# Altium PCB PCB1.PcbDoc
Units mil, origin at the board's own origin, x right, y up, seen from the top; angles counter-clockwise.
Board outline 2353 x 1336 mil, 2 copper layers (Top Layer, Bottom Layer), stack 60.4 mil thick; 21 components, 12 nets, 70 pads, 21 vias.
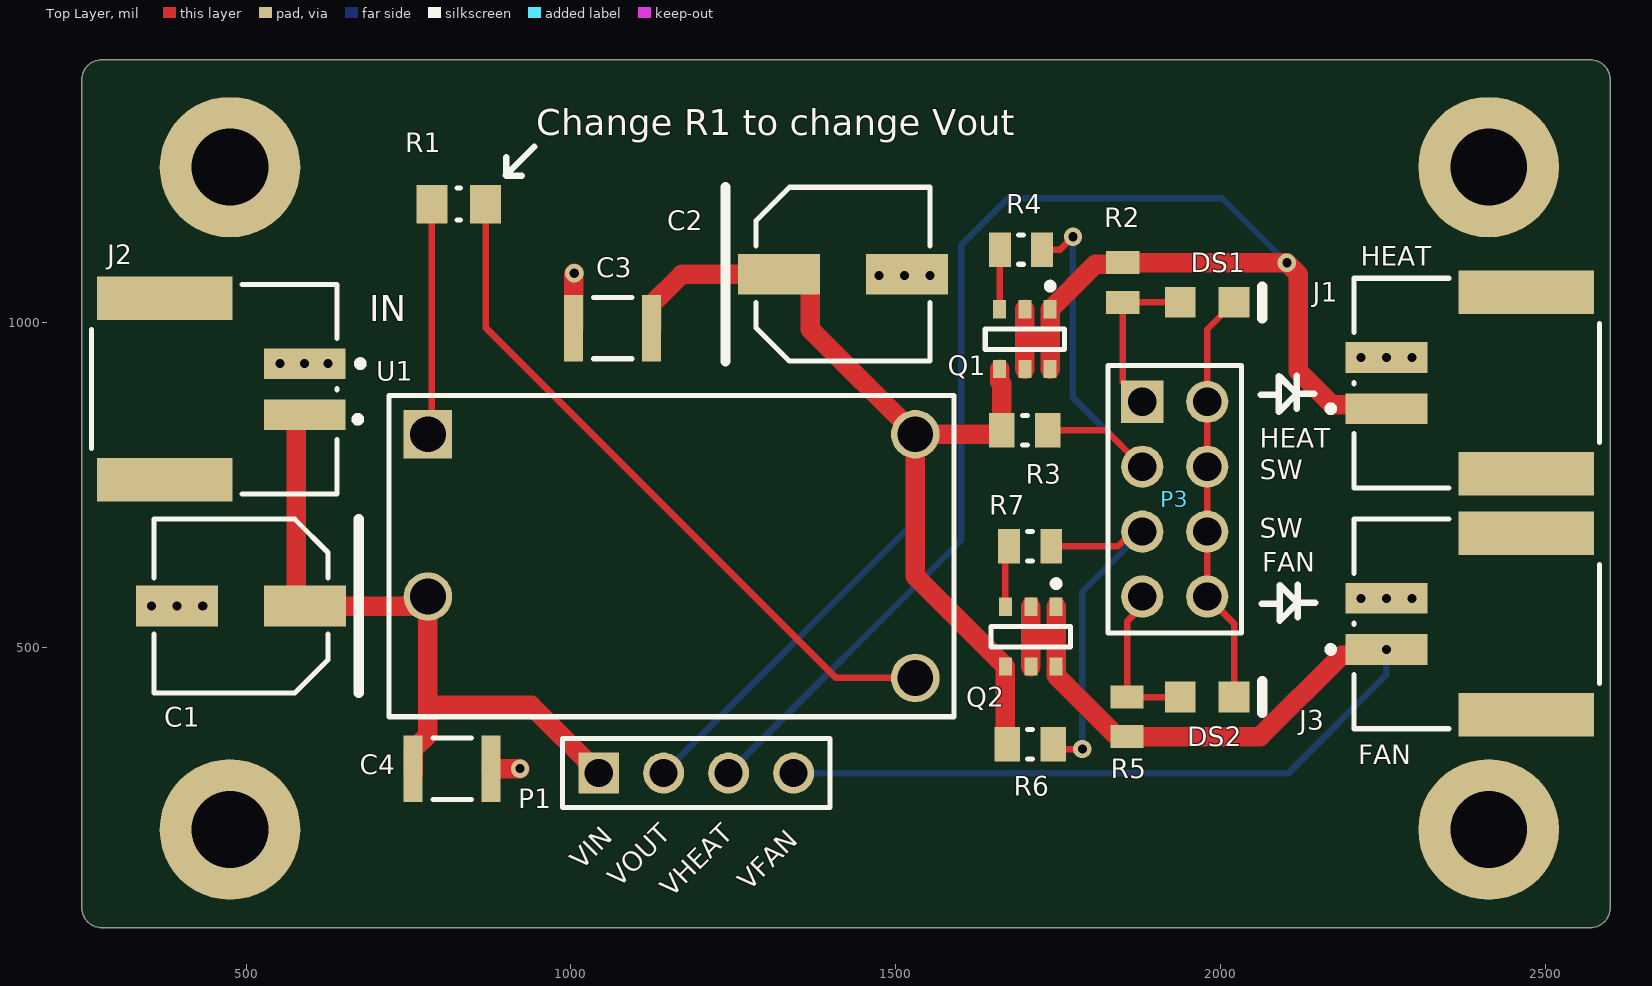
[diagram p0: Top Layer view]
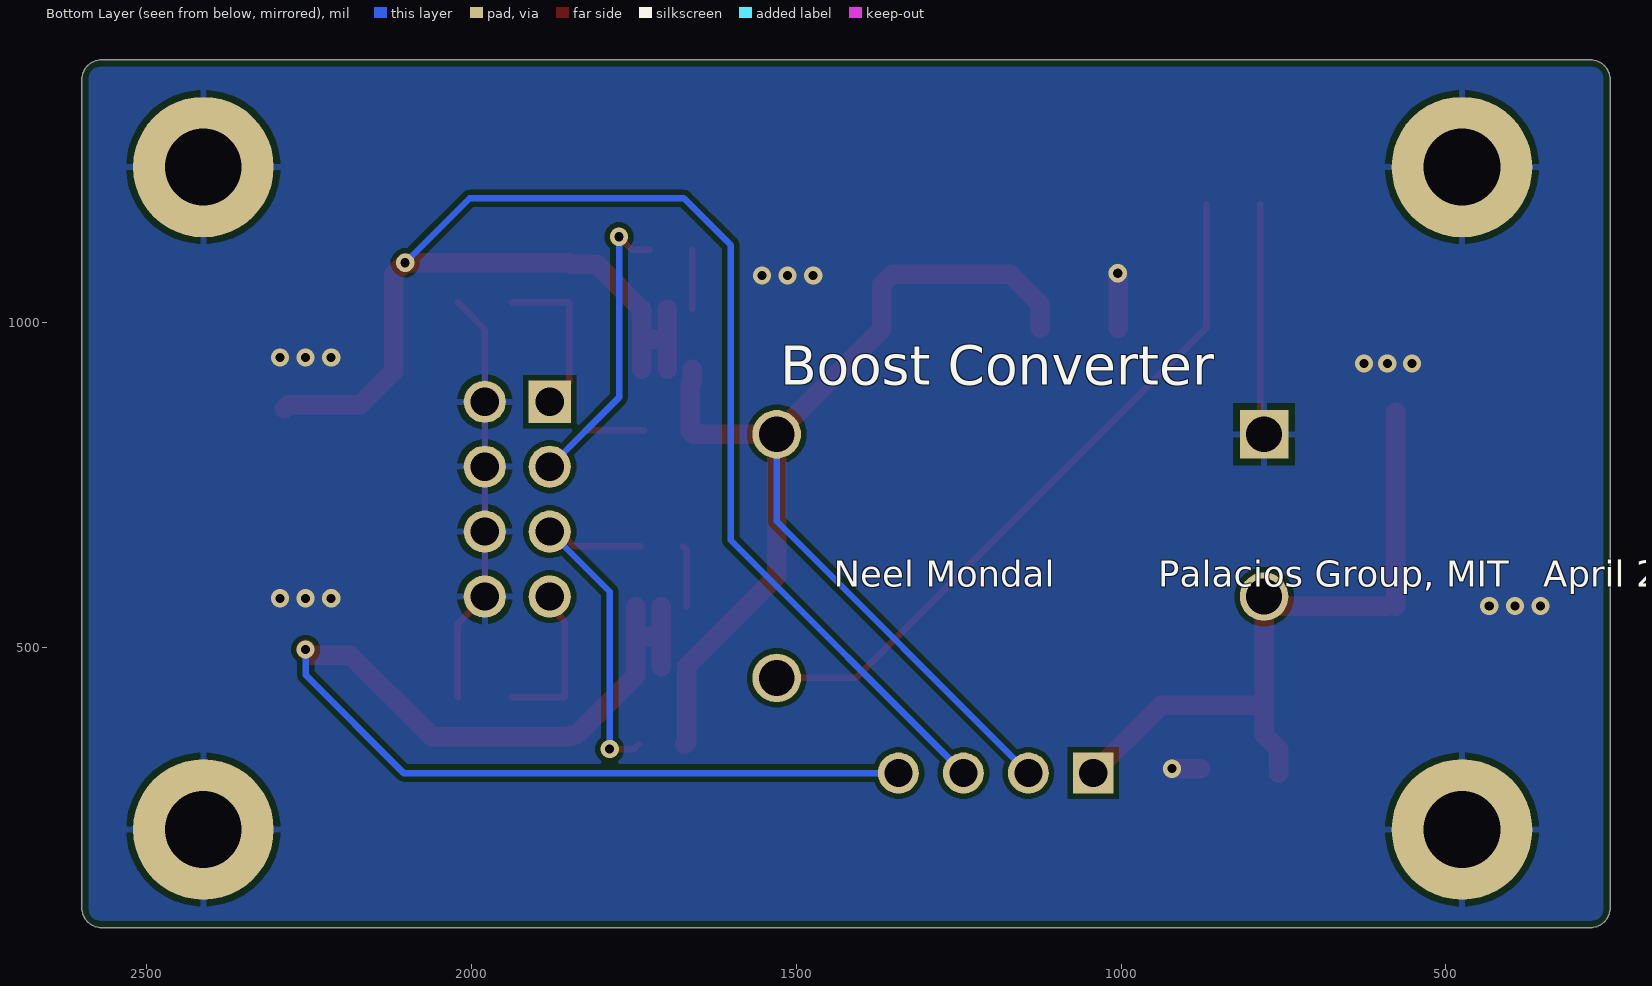
[diagram p1: Bottom Layer view, seen from below]
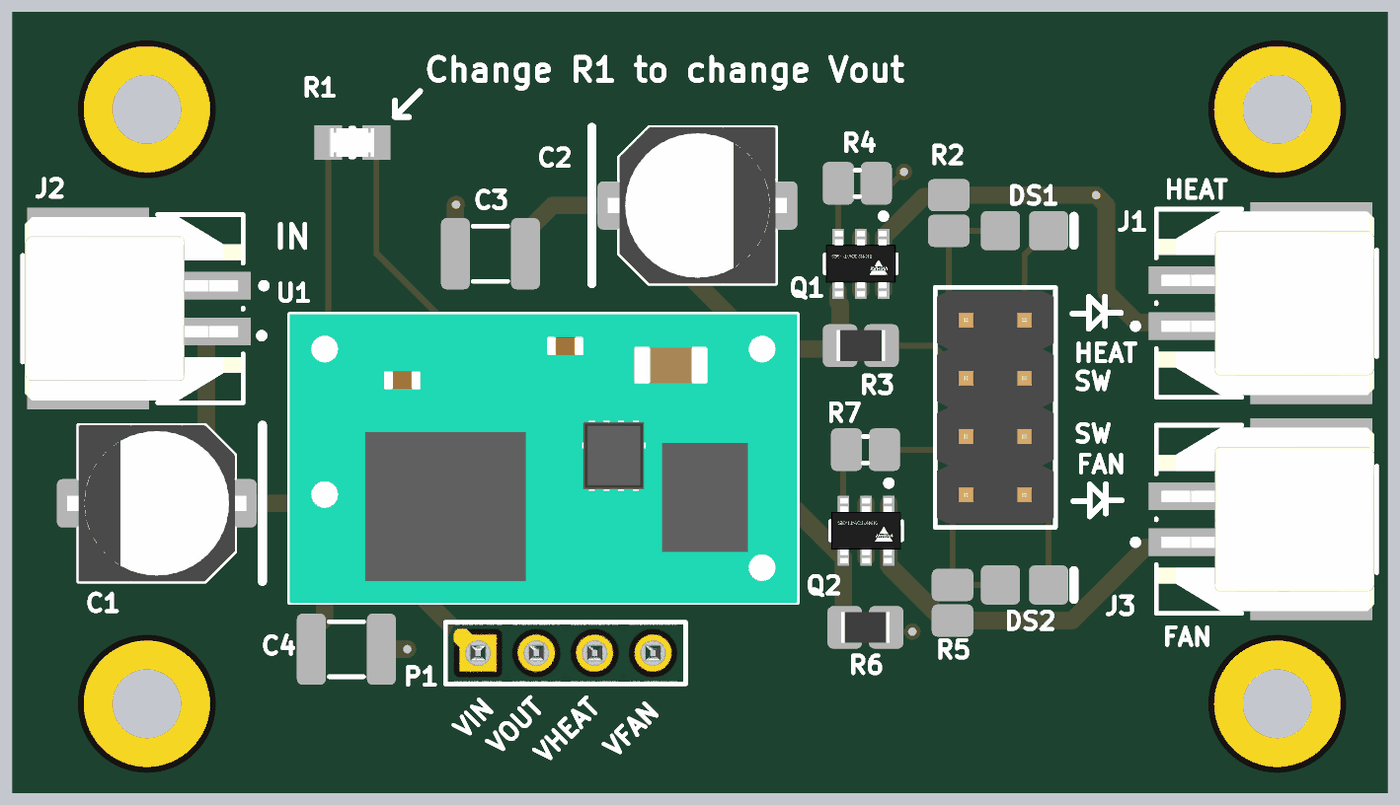
[diagram p2: 3D render of the assembled board from above, using the file's embedded part models]

## Layer stack, top to bottom
Top Solder: solder mask 0.5, Solder Resist, Dk 3.3
Top Layer: signal copper 0.7
Dielectric1: core 59, FR-4, Dk 4.3
Bottom Layer: signal copper 0.7
Bottom Solder: solder mask 0.5, Solder Resist, Dk 3.3

## Board outline
247,99 247,1375 cw(c277,1375) 277,1405 2570,1405 cw(c2570,1375) 2600,1375 2600,99 cw(c2570,99) 2570,69 277,69 cw(c277,99)

## Design rules (kind name [scope] priority, off if disabled: settings)
BoardOutlineClearance [All] p1: gap=10 ignorepadtopadclearanceinfootprint=FALSE
Clearance [All] p1: gap=8 ignorepadtopadclearanceinfootprint=FALSE except(12: Arc-Via Track-Via)
DiffPairsRouting [All] p1: maxlimit=10 minlimit=10 mostfreqgap=10 toplayer_minwidth=10 toplayer_maxwidth=10 toplayer_prefwidth=10 bottomlayer_minwidth=10 bottomlayer_maxwidth=10 bottomlayer_prefwidth=10 maxuncoupledlength=500
HoleSize [All] p1: absolutevalues=TRUE maxlimit=300 minlimit=12 maxpercent=80.000 minpercent=20.000
MinimumAnnularRing [All] p1: minimumring=7
MinimumSolderMaskSliver [All] p1: minsoldermaskwidth=5
PasteMaskExpansion [All] p1: expansion=10
PlaneClearance [All] p1: clearance=15
PlaneConnect [All] p1: pad.planeconnectstyle=Relief pad.reliefexpansion=20 pad.reliefentries=4 pad.reliefconductorwidth=10 pad.reliefairgap=10 via.planeconnectstyle=Direct via.reliefexpansion=20 via.reliefentries=4 via.reliefconductorwidth=10 via.reliefairgap=10
PolygonConnect [All] p1: thpad.connectstyle=Relief thpad.reliefconductorwidth=10 thpad.reliefentries=4 thpad.polygonreliefangle="90 Angle" thpad.airgapwidth=10 smdpad.connectstyle=Relief smdpad.reliefconductorwidth=10 smdpad.reliefentries=4 smdpad.polygonreliefangle="90 Angle" smdpad.airgapwidth=10 via.connectstyle=Direct via.reliefconductorwidth=10 via.reliefentries=4 via.polygonreliefangle="90 Angle" via.airgapwidth=10
RoutingVias [All] p1: holewidth=14 width=28 viastyle="Through Hole" minholewidth=14 minwidth=28 maxholewidth=14 maxwidth=28
SMDNeckDown [All] p1: percent=150.000
SilkToSolderMaskClearance SilkscreenOverComponentPads [IsPad] p1: minsilkscreentomaskgap=4 clearancetoexposedcopper=TRUE
SolderMaskExpansion [All] p1: expansion=10 istentingtop=FALSE
Width [All] p1: maxlimit=30 minlimit=10 preferedwidth=10
23 further rules are at their usual default settings.

## Components (designator, comment, footprint, x,y, rotation, side; value= is the part's Value field where it differs from the comment)
C1 "100uF" PNSC-FK-V-D8_V 492,564 r180 top
C2 "100uF" PNSC-FK-V-D8_V 1419,1075 r0 top
C3 "22uF" MURA-1210_H_2.7_L 1064,992.17 r0 top
C4 "22uF" MURA-1210_H_2.7_L 817.04,313.71 r0 top
DS1 "HSMD-C170" AVAG-HSMX-C170_V 1979.7,1031.69 r0 top
DS2 "HSMD-C170" AVAG-HSMX-C170_V 1979.7,423.94 r0 top
J1 "502352-0200" FP-502352-0200-MFG 2394.5,907.34 r90 top locked
J2 "502352-0200" FP-502352-0200-MFG 451,898 r270 top locked
J3 "502352-0200" FP-502352-0200-MFG 2394.5,536.62 r90 top locked
P1 "61300411121" 61300411121 1192.74,307 r0 top
P3 "61300821121" 61300821121 1929.7,728.63 r270 top
Q1 "SI3493DDV-T1-GE3" FP-C-06593-MFG 1698.93,974.99 r270 top
Q2 "SI3493DDV-T1-GE3" FP-C-06593-MFG 1708.05,516.93 r270 top
R1 "12k" FP-CRCW0805-e3-IPC_A 827.2,1183 r0 top
R2 "1k" RESC2013X55X40LL15T20 1849.78,1062.2 r90 top
R3 "10k" RESC2013X60X35NL10T20 1698.93,834.61 r0 top
R4 "100" RESC2013X50X30LL20T20 1692.98,1112.99 r180 top
R5 "1k" RESC2013X55X40LL15T20 1856.23,393.43 r270 top
R6 "10k" RESC2013X60X35NL10T20 1706.98,351.11 r0 top
R7 "100" RESC2013X50X30LL20T20 1706.98,655.99 r180 top
U1 "PTN04050CAD" EUU0004A 1155,641 r0 top

## Footprints (in the part's own frame and the unit in brackets; to place one, negate y for a bottom-side part, rotate by r counter-clockwise, add the part's x,y. Pads: shape width x height; smd on the part's side, far side on the other; paste and mask are expansions set on the pad)
61300411121 [mm] "Pin Header, pitch 2.54 mm, THT, Vertical, single row, 4p"
  rect 1.6x1.6 hole 1.1: 1(-3.81,0)
  round 1.6 hole 1.1: 2(-1.27,0) 3(1.27,0) 4(3.81,0)
  silkscreen extent -5.23,-1.35 5.23,1.35, body extent -5.08,-1.27 5.08,1.27, height 8.57
61300821121 [mm] "Pin Header, pitch 2.54 mm, THT, Vertical, dual row, 8p"
  rect 1.65x1.65 hole 1.1: 1(-3.81,-1.27)
  round 1.65 hole 1.1: 2(-3.81,1.27) 3(-1.27,-1.27) 4(-1.27,1.27) 5(1.27,-1.27) 6(1.27,1.27) 7(3.81,-1.27) 8(3.81,1.27)
  silkscreen extent -5.23,-2.62 5.23,2.62, body extent -5.08,-2.54 5.08,2.54, height 8.59
AVAG-HSMX-C170_V [mm] "SMD, 2-Leads, Body 2x1.25mm, Height 0.8mm"
  rect 1.2x1.2 smd: 1(-1.05,0) 2(1.05,0)
  silkscreen extent 2.15,-0.63 2.15,0.63, body extent -1,-0.63 1,0.63, height 0.8
EUU0004A [mm] "Module, 4-Leads, Body 22.1x12.57mm"
  rect 1.9x1.9 hole 1.4: 1(-9.53,4.765)
  round 1.9 hole 1.4: 2(-9.53,-1.585) 3(9.53,-4.765) 4(9.53,4.765)
  silkscreen extent -12.4,-6.28 11.05,6.28, body extent -11.05,-6.28 11.04,6.29, height 7.8
FP-502352-0200-MFG [mm]
  rect 1.2x3.2 smd paste+0 mask+0: 1(-1,3.53) 2(1,3.53)
  rect 1.7x5.3 smd paste+0 mask+0: 3(-3.55,-1.95) 4(3.55,-1.95)
  silkscreen extent -4.1,-4.8 4.1,5.83, body extent -4.5,-4.9 4.5,5.23, height 0.25
FP-C-06593-MFG [mil]
  rect 28x20 smd paste+0 mask+0: 1(-46,39) 2(-46,0) 3(-46,-39) 4(46,-39) 5(46,0) 6(46,39)
  silkscreen extent -87,-61 16,61, body extent -64,-65 64,65, height 10
FP-CRCW0805-e3-IPC_A [mil]
  rect 47.5x59.38 smd paste+0 mask+0: 1(-41.37,0) 2(41.37,0)
  silkscreen extent -3,-25 3,25, body extent -85,-49 85,49, height 10
MURA-1210_H_2.7_L [mm] "Chip Capacitor, 2-Leads, Body 3.5x2.7mm, IPC High Density"
  rect 0.75x2.6 smd: 1(-1.525,0) 2(1.525,0)
  silkscreen extent -0.75,-1.2 0.75,1.2, body extent -1.75,-1.35 1.75,1.35, height 2.7
PNSC-FK-V-D8_V [mm] "CAPAE, 2-Leads, Body 6.80x6.80mm"
  rect 3.2x1.6 smd: 1(-2.5,0) 2(2.5,0)
  silkscreen extent -4.6,-3.4 3.4,3.4, body extent -3.9,-3.4 3.9,3.4, height 8
RESC2013X50X30LL20T20 [mm] "Chip Resistor, 2-Leads, Body 2.00x1.25mm, IPC High Density"
  rect 0.85x1.35 smd: 1(-0.825,0) 2(0.825,0)
  silkscreen extent -0.1,-0.58 0.1,0.58, body extent -1.1,-0.73 1.1,0.73, height 0.5
RESC2013X55X40LL15T20 [mm] "Chip Resistor, 2-Leads, Body 2.00x1.25mm, IPC High Density"
  rect 0.9x1.3 smd: 1(-0.775,0) 2(0.775,0)
  body extent -1.07,-0.7 1.07,0.7, height 0.55
RESC2013X60X35NL10T20 [mm] "Chip Resistor, 2-Leads, Body 2.1x1.35mm, IPC Medium Density"
  rect 1x1.35 smd: 1(-0.9,0) 2(0.9,0)
  silkscreen extent -0.1,-0.58 0.1,0.58, body extent -1.05,-0.68 1.05,0.67, height 0.6

## Part data
C1 C2: library part CMP-2000-06206-1, "Aluminum Electrolytic Capacitor, 100 uF, +/- 20%, 25 V, 2-Pin SMD (Size Code D8), -55 to 105 degC, RoHS, Tape and Reel", Capacitance=100µF, Case Size/Dimension=Ø6.3x7.7mm, Lifetime@Temperature=2000Hrs@105°C, Manufacturer=Panasonic, Operating Temp Range=-55to+105°C, Operating Temp-Max=105°C, Package Description="2-Pin Electrolytic Aluminum Capacitor, Body 6.6 x 6.6 mm", Package Reference=FK-V-D8, Rated Voltage=25V, Ripple Current=280mA, Datasheet URL=http://industrial.panasonic.com/cdbs/www-data/pdf/RDE0000/ABA0000C1181.pdf, Datasheet Version=03/2016, Impedance=0.34O, Manufacturer URL=http://www.panasonic.com/, Mounting Technology=SurfaceMount, Package URL=http://industrial.panasonic.com/cdbs/www-data/pdf/RDE0000/DME0000COL48.pdf, Series=FK, Type=Can
C3 C4: library part CMP-2000-06361-1, "Chip Monolithic Ceramic Capacitor, 22 uF, +/- 10%, -55 to 85 degC, 2-Pin SMD (1210), RoHS, Tape and Reel", Capacitance=22µF, Manufacturer=Murata, Operating Temperature=-55°C~85°C, Package / Case=1210(3225Metric), Package Description="2-Pin Surface Mount Device, Body 3.2 x 2.5 mm", Package Reference=1210, Ratings=-, Standard Package=1,000, Temperature Coefficient=X5R, Tolerance=±10%, Voltage - Rated=16V, Applications=GeneralPurpose, Catalog Drawings=GRMSeries_1210_2.5, Category=Capacitors, Datasheet URL=https://datasheet.ciiva.com/26915/getdatasheetpartid-88858-26915376.pdf, Datasheet Version=05/2014, Family=CeramicCapacitors, Featured Product=GA3SafetyRecognizedCapsandHi-CapMLCC, Features=-, Height - Seated (Max)=-, Lead Spacing=-, Lead Style=-, Manufacturer URL=http://www.murata.com/, Mounting Technology=SurfaceMount, Mounting Type=SurfaceMount,MLCC, Online Catalog=GRMSeries, Other Names=490-1882-2, Packaging=Tape&Reel(TR), Product Training Modules=High-CapMultilayerCeramicCapacitors, Series=GRM, Size / Dimension="0.126\"Lx0.098\"W(3.20mmx2.50mm)", Thickness (Max)="0.106\"(2.70mm)", Voltage Rating DC=16V
DS1 DS2: library part CMP-2000-06421-1, "LED Uni-Color Orange, 52 mW, 20 mA, -40 to 85 degC, 2-Pin SMD, RoHS, Tape and Reel", Forward Current If=20mA, Forward Voltage=2.2V, LED Colour=Orange, Manufacturer=Avago, Operating Temperature Max=85°C, Operating Temperature Min=-30°C, Operating Temperature Range=-30°Cto+85°C, Opto Case Style=SMD, Package Description="2-Pin Surface Mount Device, Body 2 x 1.25 mm, Height 0.8 mm", Package Reference=HSMX-C170, Power Dissipation Pd=52mW, Storage Temperature Min=-40°C, Bulb Size=1.25mmx1.4mm, Datasheet URL=http://docs.avagotech.com/docs/AV02-0551EN, Datasheet Version=03/2012, Dominant Wavelength=604nm, External Depth=0.8mm, External Length / Height=2mm, External Width=1.25mm, Forward Current If Max=20mA, Forward Voltage VF Max=2.2V, LED Mounting=SMD, LED Type=Standard, Lens Shape=Rectangular, Light Area Height=1.25mm, Luminous Intensity=8mcd, Luminous Intensity Typ=8mcd, Manufacturer URL=http://www.avagotech.com/, Mounting Technology=SurfaceMount, Mounting Type=SMD, MSL=MSL2A-4weeks, No. of Pins=2, Opto Mounting Orientation=Top, Package / Case=SMD, Peak Forward Current=20mA, Peak Wavelength=605nm, PIV Max=5V, Storage Temperature Max=85°C, SVHC=NoSVHC(19-Dec-2012), Viewing Angle=170°, Voltage Vf Typ=2.2V, Wavelength Typ=605nm
J1 J2 J3: library part CMP-04776-000115-1, "CONN HEADER SMD R/A 2POS 2MM", Ambient Temperature Range High=+105°C, Ambient Temperature Range Low=-40°C, Current Rating=3A, Manufacturer=Molex, Temperature="-40°C to +105°C", Voltage Rating=125V, Automotive=No, Category=Conn, ComponentLink2Description=Datasheet, ComponentLink2URL=https://www.molex.com/webdocs/datasheets/pdf/en-us/5023520200_PCB_HEADERS.pdf, Conn Gender=Male, Conn Orientation="Right Angle", Contact Material=Tin,Nickel, Device Class L1=Connectors, Device Class L2="Headers and Wire Housings", Device Class L3=unset, Digikey Description="CONN HEADER SMD R/A 2POS 2MM", Footprint Url=https://www.molex.com/pdm_docs/sd/5023520200_sd.pdf, Height=6.6mm, Lead Free=Yes, Manufacturer Part Number=502352-0200, Mouser Description="DuraClik™ Wire-to-Board Header, Single Row, Right Angle, 2 Circuits, Tin (Sn)", Number of Contacts=2, Number of Rows=1, Octopart=https://octopart.com/502352-0200-molex-9519058, Package=502352-0200, Pitch=2mm, RoHS=TRUE, Temperature Range High=+105°C, Temperature Range Low=-40°C
P1: library part CMP-1502-01064-1, "THT Vertical Pin Header WR-PHD, Pitch 2.54 mm, Single Row, 4 pins", Contact Resistance=20mOhm, Manufacturer="Wurth Elektronik", Operating Temperature=-40to105degC, Rated Current=3A, Withstanding Voltage=500VAC, Working Voltage=250VAC, Datasheet URL=https://katalog.we-online.de/em/datasheet/6130xx11121.pdf, Gender=Male, Manufacturer URL=http://www.we-online.de, Mounting Technology=THT, Orientation=Vertical, Package Reference=61300411121, Packaging=Bag, Part Number=61300411121, Pin Number=4, Pitch=2.54mm, Publisher=WurthElektronik, Row Number=Single
P3: library part CMP-1502-01078-1, "THT Vertical Pin Header WR-PHD, Pitch 2.54 mm, Dual Row, 8 pins", Contact Resistance=20mOhm, Manufacturer="Wurth Elektronik", Operating Temperature=-40to105degC, Rated Current=3A, Withstanding Voltage=500VAC, Working Voltage=250VAC, Datasheet URL=https://katalog.we-online.de/em/datasheet/6130xx21121.pdf, Gender=Male, Manufacturer URL=http://www.we-online.de, Mounting Technology=THT, Orientation=Vertical, Package Reference=61300821121, Packaging=Bag, Part Number=61300821121, Pin Number=8, Pitch=2.54mm, Publisher=WurthElektronik, Row Number=Dual
Q1 Q2: library part CMP-02550-000156-1, "MOSFET P-CHANNEL 20V 8A 6TSOP", Continuous Drain Current=-7.5A, Drain To Source Breakdown Voltage=-20V, Drain To Source Resistance=0.02Ω, Gate To Source Voltage=8V, Input Capacitace At Vds="1825pF @ -10V", Manufacturer=Vishay, Max Forward Diode Voltage=-1.2V, Max Junction Temp=+150°C, Package=C-06593, Power Dissipation=2W, Pulse Drain Current=-32A, Temperature="-55°C to +150°C", Temperature Range Low=-55°C, Typ Forward Diode Voltage=-0.8V, Automotive=No, Category=Trans, ComponentLink2Description=Datasheet, ComponentLink2URL=https://www.vishay.com/docs/74735/si3493ddv.pdf, Depletion Mode=False, Device Class L1="Discrete Semiconductors", Device Class L2=Transistors, Device Class L3=MOSFETs, Digikey Description="MOSFET P-CHANNEL 20V 8A 6TSOP", Drain To Source Voltage=-20V, Footprint Url=https://www.vishay.com/docs/71200/71200.pdf, Gate Charge At Vgs="34.8nC @ -8V", Height=1.1mm, Lead Free=Yes, Manufacturer Part Number=SI3493DDV-T1-GE3, Number of Channels=1, Number Of P Channels=1, Octopart=https://octopart.com/si3493ddv-t1-ge3-vishay-81014282, Reverse Recovery Charge=34.8nC, Reverse Recovery Time=21ns, RoHS=TRUE, Rthja Max=62.5°C/W, Standoff Height=0.01mm, Temperature Range High=+150°C, Threshold Vgs Max=-1V, Threshold Vgs Min=-0.4V, Transconductance=30S, Turn Off Delay Time=95ns, Turn On Delay Time=25ns
R1: library part CMP-2001-04934-2, "RES Thick Film, 12kΩ, 1%, 0.125W, 100ppm/°C, 0805", Case Code (Imperial)=0805, Case Code (Metric)=2012, Max Operating Temperature=155°C, Max Power Dissipation=125mW, Min Operating Temperature=-55°C, Package Quantity=10, Resistance=12kR, Temperature Coefficient=100ppm/°C, Tolerance=1%, Voltage Rating=150V, Case/Package=0805, Composition="Thick Film", Contact Plating=Tin, Depth=1.25mm, Features="Automotive AEC-Q200", Height=0.45mm, Lead Free="Lead Free", Length=2mm, Military Standard=Not, Mount="Surface Mount", Number of Terminations=2, Packaging="Tape and Reel", Power Rating=125mW, Radiation Hardening=No, Termination=SMD/SMT, Voltage Rating (DC)=150V, Weight=0.000194oz, Width=0.049inch
R2 R5: library part CMP-2001-04738-1, "TNPW08051K00BEEN", Manufacturer="Vishay Dale", Part Number=TNPW08051K00BEEN
R3 R6: library part CMP-1659-00013-4, "Chip Resistor, 10 KOhm, +/- 1%, 0.125 W, -55 to 155 degC, 0805 (2012 Metric), RoHS, Tape and Reel", Manufacturer=Yageo, Max Operating Temperature="155 degC", Min Operating Temperature="-55 degC", Package Quantity=5000, Voltage Rating="150 V", ComponentLink1Description="Manufacturer URL", ComponentLink1URL=http://www.yageo.com/, ComponentLink2Description=Datasheet, ComponentLink2URL=http://www.yageo.com/documents/recent/PYu-RC_Group_51_RoHS_L_04.pdf, DatasheetVersion="Rev. 4, 02/2016", Height="0.5 mm", Length="2 mm", Mount="Surface Mount", Mounting Technology="Surface Mount", PackageDescription="2-Pin Surface Mounted Device, Body 2 x 1.25 mm", PackageReference=0805, Packaging="Tape and Reel", Pins=2, REACH SVHC="No SVHC", RoHSCompliant=true
R4 R7: library part CMP-2001-04901-1, Manufacturer="Vishay Dale", Part Number=CRCW0805100RFKEA
U1: library part CMP-0387-00658-2, "12 W, 3.3 / 5 V Input, Wide Adjust Output Boost Converter, -40 to 85 degC, 4-pin Module (EUU4), Pb-Free (RoHS)", Manufacturer="Texas Instruments", ComponentLink1Description="Manufacturer URL", ComponentLink1URL=http://www.ti.com/, ComponentLink2Description=Datasheet, ComponentLink2URL=http://www.ti.com/general/docs/lit/getliterature.tsp?genericPartNumber=PTN04050C&fileType=pdf, ComponentLink3Description="Package Specification", ComponentLink3URL=http://www.ti.com/litv/pdf/mpds218a, ComponentLink4Description="URL Link1", ComponentLink4URL="Samples URL:http://www.ti.com/product/ptn04050c#samples", DatasheetVersion=SLTS251A, Eco-Plan="Pb-Free (RoHS)", Iout(Max)(A)=2.4, Mounting Technology="Through Hole", PackageDescription="4-Pin Plastic Special Shape, Body 12.57 x 22.1 mm", PackageReference=EUU0004A, PackageVersion=4205246-2/C, PartNumber=PTN04050CAD, Regulated Outputs(#)=1, SubFamily="Non-Isolated POL", Vin(Max)(V)=5.5, Vin(Min)(V)=2.95, VO Adjustable=TRUE, Vout(Max)(V)=15, Vout(Min)(V)=5

## Free pads (board coordinates)
  round 216.54 hole 118.11: 5(475,220) 5(475,1240) 5(2413,220) 5(2413,1240)

## Via types
v1: diameter 28, hole 14, Top Layer to Bottom Layer, tented both sides, 21 vias

## Nets (pads, with @x,y where several pads share a name; then routed paths per layer and width w, separated by ;. In a path a pad name is that pad's centre, name@x,y a point inside that pad or via, vN(x,y) a via of type N, cw(c..) or ccw(c..) an arc to the next point about the centre after c; other vN are vias at no path point)
FAN_LED_HI: DS2.1 P3.7 R5.1 | length 246.5
  Top Layer w10: P3.7 1879.7,563.76 1856.23,540.29 R5.1 DS2.1
FAN_SW: P3.5 R6.2 R7.1 | length 570.7
  Top Layer w10: R7.1 1842.19,655.99 1864.83,678.63 P3.5 ; R6.2 1749.72,343.8 v1(1787.37,343.8)
  Bottom Layer w10: v1(1787.37,343.8) 1787.37,586.3 P3.5
GND: C1.2 C2.2 C3.1 C4.2 DS1.2 DS2.2 J1.2 J2.1 J3.2 P3.2 P3.4 P3.6 P3.8 pad.5 R1.1 U1.1 | length 1128.1
  Top Layer w10: U1.1 785.83,834.63 R1.1 ; DS2.2 2021.04,537.29 P3.8 P3.6 P3.4 P3.2 1979.7,990.35 DS1.2
  Top Layer w30: C4.2 v1(921.53,313.71) ; C3.1 1003.96,1075.33 v1(1005.11,1076.48)
  other v1: 354.15,564 393.57,564 433,564 2216.16,575.99 2255.53,575.99 2294.96,575.99 552.05,937.37 589.98,937.37 625.86,937.37 2216.16,946.71 2255.53,946.71 2294.96,946.71 1474,1073 1513.43,1073 1552.86,1073
HEAT_LED_HI: DS1.1 P3.1 R2.1 | length 254
  Top Layer w10: P3.1 1849.78,908.55 R2.1 DS1.1
HEAT_SW: P3.3 R3.2 R4.1 | length 622.5
  Top Layer w10: R4.1 1753.32,1112.99 v1(1773.01,1132.67) ; R3.2 1823.72,834.61 P3.3
  Bottom Layer w10: v1(1773.01,1132.67) 1773.01,885.32 P3.3
NetQ1_3: Q1.3 R4.2 | length 92.2
  Top Layer w10: Q1.3 1659.93,1112.42 R4.2
NetQ2_3: Q2.3 R7.2 | length 95.3
  Top Layer w10: Q2.3 1669.05,650.53 R7.2
NetR1_2: R1.2 U1.3 | length 1075.2
  Top Layer w10: R1.2 868.58,992.9 1408.08,453.4 U1.3
VFAN: J3.1 P1.4 Q2.1 Q2.2 Q2.5 Q2.6 R5.2 | length 1854.5
  Top Layer w30: Q2.5 1708.05,516.93 ; Q2.2 1708.05,516.93 ; Q2.1 1747.05,516.93 ; v1(2255.53,497.25) 2246.91,488.62 2186.92,488.62 2061.21,362.92 1848.36,362.92 1845.64,365.64 1838.71,365.64 1747.05,457.3 1747.05,516.93 ; 1708.05,516.93 1747.05,516.93
  Bottom Layer w10: P1.4 2104.65,307 2255.53,457.88 v1(2255.53,497.25)
VHEAT: J1.1 P1.3 Q1.1 Q1.2 Q1.5 Q1.6 R2.2 | length 2517
  Top Layer w30: Q1.5 1698.93,974.99 ; Q1.2 1698.93,974.99 ; Q1.6 1737.93,974.99 ; J1.1@2288.11,867.97 2281.91,874.16 2171.47,874.16 2120,925.63 2120,1075 v1(2102.28,1092.72) R2.2 1847.06,1090 1806.95,1090 Q1.1 1737.93,974.99 ; 1698.93,974.99 1737.93,974.99
  Bottom Layer w10: P1.3 1601,665.26 1601,1119.91 1673.09,1191.99 2003.01,1191.99 v1(2102.28,1092.72)
VIN: C1.1 C4.1 J2.2 P1.1 U1.2 | length 1081.1
  Top Layer w30: C1.1@576.98,564 J2.2@576.98,862.63 ; C1.1 753.08,564 767.68,578.6 U1.2 779.8,410.99 ; C4.1@757,307 C4.1 757,342.94 779.8,365.75 779.8,410.99 ; P1.1 938.75,410.99 779.8,410.99
VOUT: C2.1 C3.2 P1.2 Q1.4 Q2.4 R3.1 R6.1 U1.4 | length 2054.1
  Top Layer w30: C3.2 1124.04,1028.11 1170.93,1075 C2.1 1352.07,1075 1368.57,1058.5 1368.57,990.23 U1.4 ; Q1.4 1659.93,909.75 1663.5,906.18 R3.1 1663.5,833.28 1658.82,828.6 U1.4 ; R6.1 1669.05,353.61 Q2.4 1530.2,609.78 U1.4
  Bottom Layer w10: P1.2 1530.2,694.46 U1.4
pads on no net: J1.3 J1.4 J2.3 J2.4 J3.3 J3.4

## Polygon pours and split planes (outlines as drawn)
GND on Bottom Layer "GND_L02_P000" (solid, pour order 0): 247,1439.03 247,1221 247,32 2614,32 2614,1452.94

## Silkscreen, mask and mechanical layers (free items; w line width, h text height)
Top Overlay:
  lines w10: 899.72,1227.49 943.35,1271.12 ; 900.38,1254.89 900.38,1226.83 924.44,1226.83 ; 2062.09,889.42 2088.68,889.42 ; 2063.49,567.66 2090.08,567.66 ; 2117.69,868.25 2117.69,918.43 ; 2119.08,546.49 2119.08,596.66 ; 2144.75,890.81 2117.47,890.81 ; 2146.14,569.05 2118.86,569.05 ; 2117.47,890.81 2090.08,918.2 2090.08,863.42 2117.47,890.81 ; 2118.86,569.05 2091.47,541.65 2091.47,596.44 2118.86,569.05
  text "Change R1 to change Vout" at 946.75,1289.02 h40
  text "HEAT" at 2215.74,1088.06 h30
  text "IN" at 689.24,1002.45 h40
  text "HEAT" at 2060.62,807.72 h30
  text "SW" at 2060.62,759.54 h30
  text "SW" at 2060.62,669.42 h30
  text "FAN" at 2064.8,616.67 h30
  text "FAN" at 2212.53,320.71 h30
  text "VIN" at 1017,156.9 h30 r45
  text "VOUT" at 1074,129.9 h30 r45
  text "VFAN" at 1274.34,124.44 h30 r45
  text "VHEAT" at 1155,114.54 h30 r45
Bottom Overlay:
  text "Boost Converter" at 1525,905 h60
  text "Neel Mondal         Palacios Group, MIT   April 2023" at 1442,594 h40
Board:
  the board outline again, w5